# Altium PCB PCB2.PcbDoc
Units mil, origin at the board's own origin, x right, y up, seen from the top; angles counter-clockwise.
Board outline 2070.38 x 1535.06 mil, 2 copper layers (Top Layer, Bottom Layer); 44 components, 42 nets, 192 pads, 68 vias.
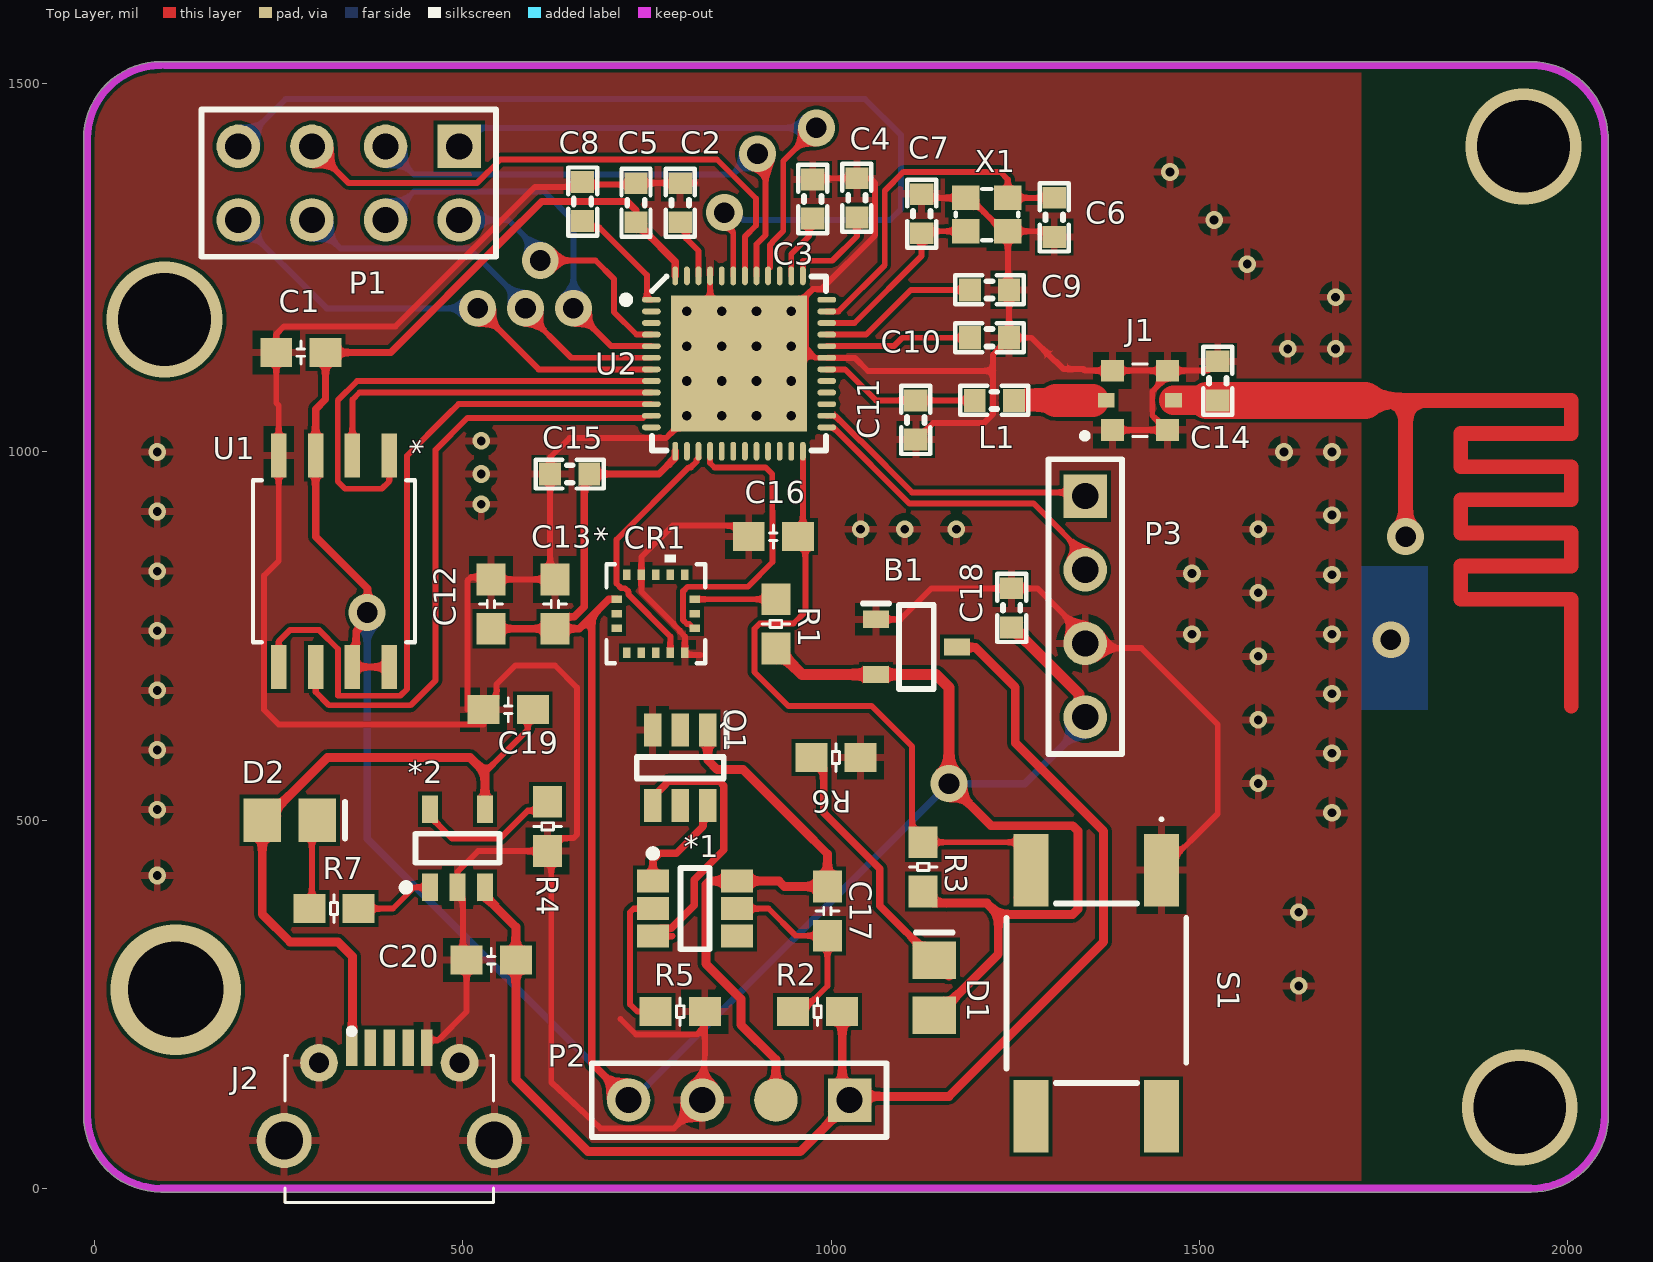
[diagram p0: Top Layer view]
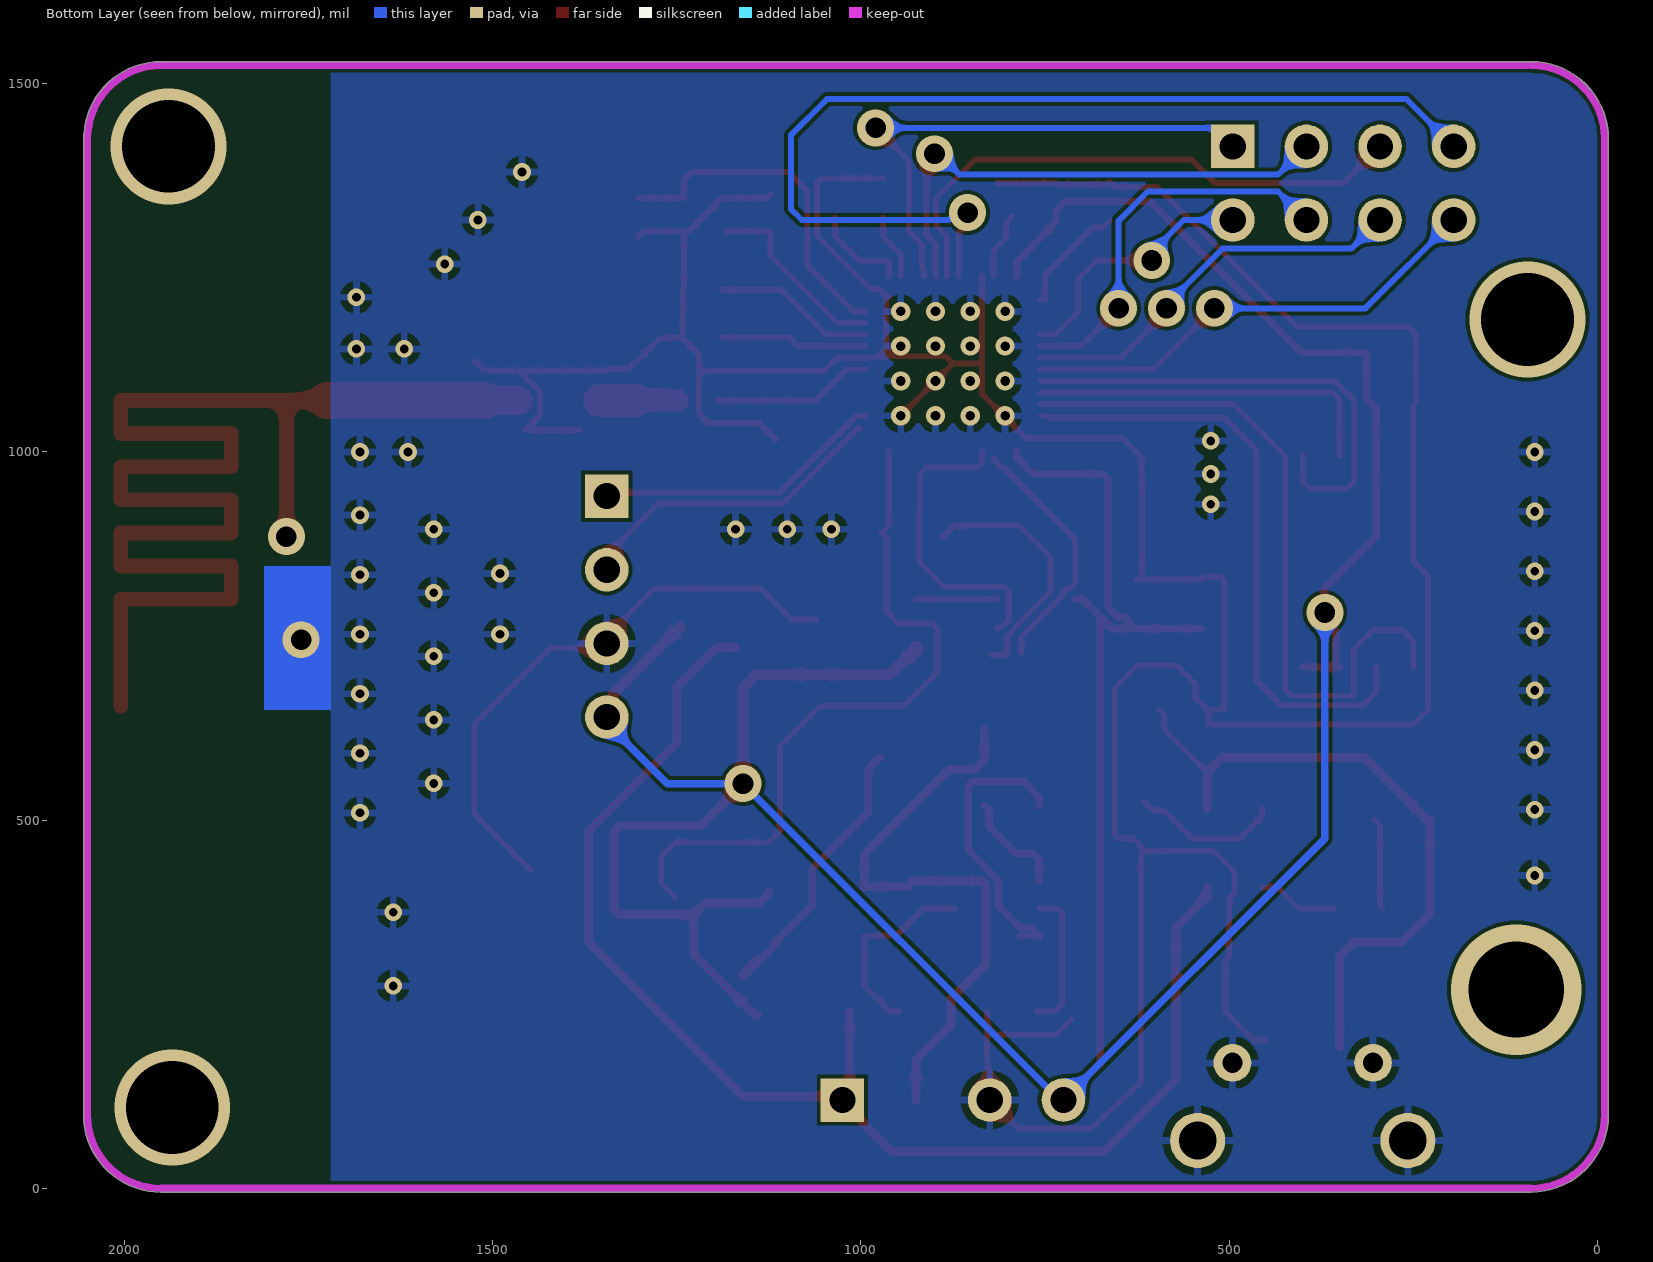
[diagram p1: Bottom Layer view, seen from below]
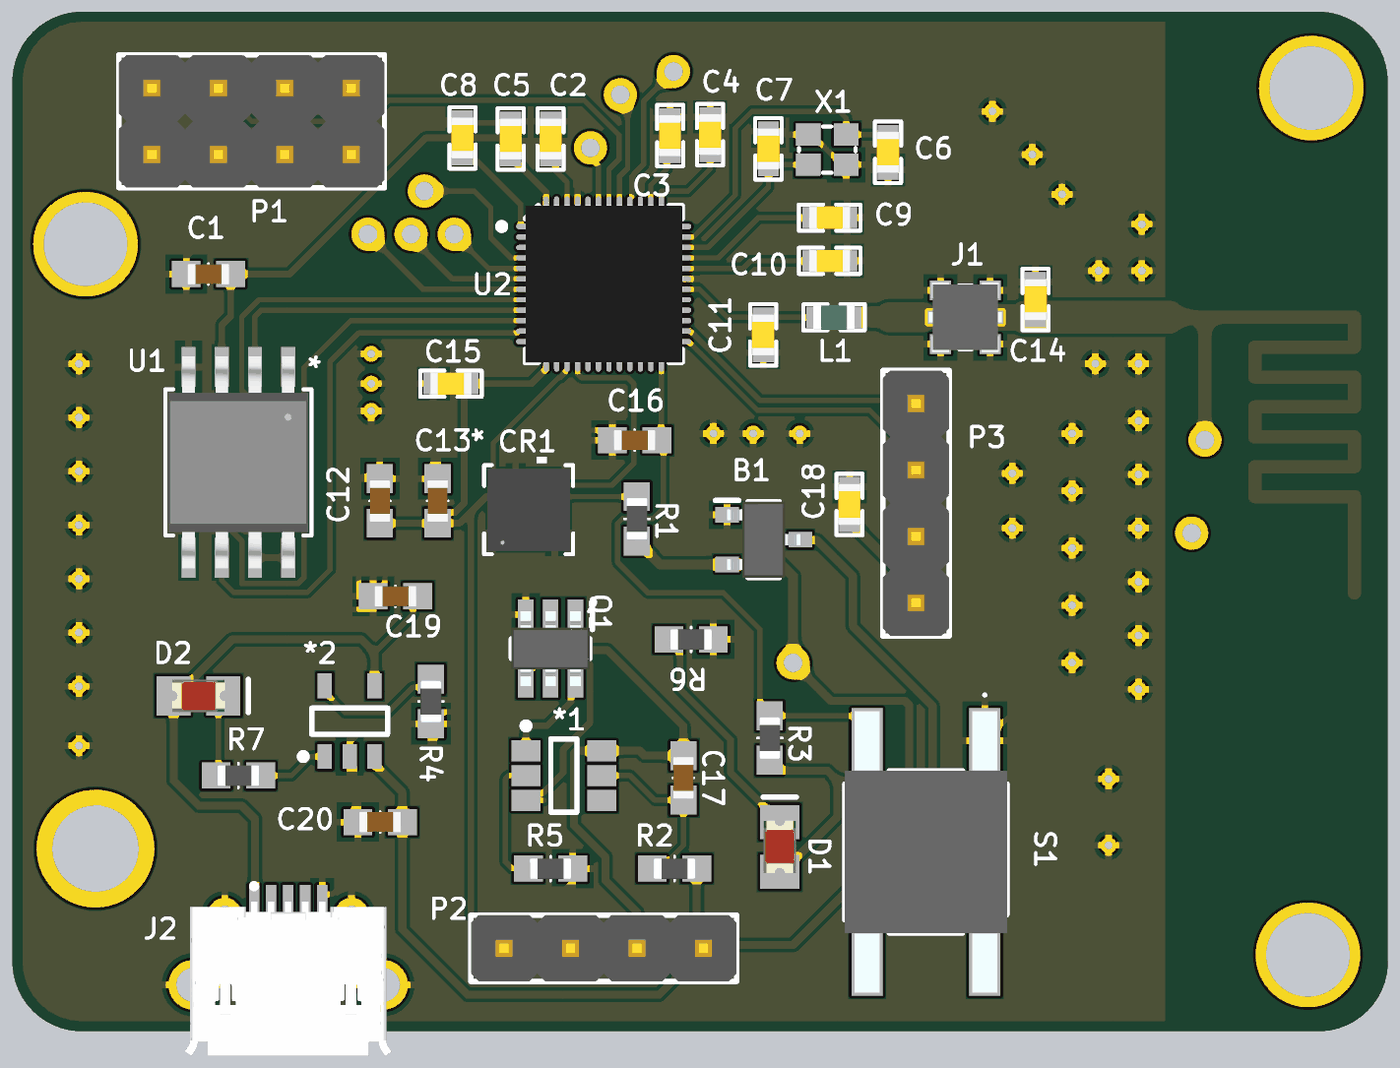
[diagram p2: 3D render of the assembled board from above, using the file's embedded part models]

## Layer stack, top to bottom
Top Solder: solder mask 0.4, Solder Resist, Dk 3.5
Top Layer: signal copper 1.4
Dielectric 1: dielectric 12.6, FR-4, Dk 4.8
Bottom Layer: signal copper 1.4
Bottom Solder: solder mask 0.4, Solder Resist, Dk 3.5

## Board outline
-15.02,100 ccw(c90,100) 89.97,-5.02 ccw(c90,0) 90,-5.02 1949.82,-5.02 ccw(c1950.35,-0.03) 1950.35,-5.04 ccw(c1950.35,99.97) 2055.37,99.97 ccw(c2050.35,99.97) 2055.01,101.82 2055.01,1430 ccw(c2050,1430) 2054.82,1431.38 ccw(c1950,1425) 1950,1530.01 1575,1530.01 ccw(c1575,1525) 1574.94,1530.01 95,1530.01 ccw(c95,1525) 92.5,1529.35 ccw(c90,1525) 90,1530.01 ccw(c90,1425) -15.02,1425.05 ccw(c-10,1425) -15.02,1425

## Design rules (kind name [scope] priority, off if disabled: settings)
Clearance [All] p1: gap=5 ignorepadtopadclearanceinfootprint=FALSE
HoleSize [All] p1: absolutevalues=TRUE maxlimit=129.92 minlimit=1 maxpercent=80.000 minpercent=20.000
MinimumSolderMaskSliver [All] p1: minsoldermaskwidth=0
PolygonConnect [All] p1: connectstyle=Relief reliefconductorwidth=10 reliefentries=4 polygonreliefangle="90 Angle" airgapwidth=10
RoutingVias [All] p1: holewidth=28 width=50 viastyle="Through Hole" minholewidth=28 minwidth=50 maxholewidth=28 maxwidth=50
ShortCircuit [All] p1 off: allowed=FALSE
SilkToSilkClearance [All] p1: silktosilkclearance=0
SilkToSolderMaskClearance [IsPad] p1: minsilkscreentomaskgap=0 clearancetoexposedcopper=TRUE
SolderMaskExpansion [All] p1: expansion=4 istentingtop=FALSE
Width [All] p1: maxlimit=50 minlimit=5 preferedwidth=8 minimp=50.000000 maximp=50.000000 favimp=50.000000
25 further rules are at their usual default settings.

## Components (designator, comment, footprint, x,y, rotation, side; value= is the part's Value field where it differs from the comment)
*1 "DW01A" DW01 815,380 r0 top
*2 "TP4054" TP4054 492.6,461.85 r90 top
B1 "XC6206P332MR-G" SOT95P280X130-3N 1115.79,735.2 r0 top
C1 "0.1uF" Cap-0603 280,1135 r180 top
C2 "1.0uF" CAPC1608X06L 795,1338.43 r90 top
C3 "12pF" CAPC1608X06L 975,1343.42 r90 top
C4 "12pF" CAPC1608X06L 1035,1345 r90 top
C5 "4.7uF" CAPC1608X06L 735,1338.42 r270 top
C6 "16pF" CAPC1608X06L 1302.91,1318.43 r270 top
C7 "16pF" CAPC1608X06L 1122.91,1323.42 r90 top
C8 "100nF" CAPC1608X06L 662.46,1340 r270 top
C9 "100pF" CAPC1608X06L 1215,1220 r0 top
C10 "100pF" CAPC1608X06L 1215,1155 r0 top
C11 "0.8pF" CAPC1608X06L 1115,1043.43 r90 top
C12 "100nF" Cap-0603 538.07,793.46 r270 top
C13 "10uF" Cap-0603 625,793.46 r270 top
C14 "1.2pF" CAPC1608X06L 1525,1096.57 r270 top
C15 "100nF" CAPC1608X06L 645,970 r0 top
C16 "10uF" Cap-0603 921.54,885 r0 top
C17 "0.1uF" Cap-0603 995,376.54 r270 top
C18 "1uF" CAPC1608X06L 1245,788.19 r270 top
C19 "10uF" Cap-0603 561.54,650 r180 top
C20 "10uF" Cap-0603 538.47,310 r180 top
CR1 "LIS3DH" LGA-16_3x3x1mm_STM 762,780.31 r90 top
D1 "LED" LED-0805 1140,272.6 r90 top
D2 "LED" LED-0805 265,500 r0 top
J1 "MM8130-2600RA2" MM81302600RA2 1419.33,1070 r90 top
J2 "MICROXNJ" MICROXNJ 400,65 r180 top
L1 "3.9nH" INDC1608X06L 1221.58,1070 r0 top
P1 "Header 4X2" HDR2X4 495,1415 r180 top
P2 "Header 4" HDR1X4#1 875,120 r180 top
P3 "Header 4" HDR1X4#2 1345,790 r270 top
Q1 "UMW8205A" SOT95P285X140-6N 795,571.18 r270 top
R1 "10k" Res-0603 925,766.54 r270 top
R2 "100Ω" Res-0603 981.54,240 r0 top
R3 "10kΩ" Res-0603 1125,436.54 r90 top
R4 "1kΩ" Res-0603 615,491.54 r270 top
R5 "1kΩ" Res-0603 795,240 r180 top
R6 "1kΩ" Res-0603 1006.54,585 r180 top
R7 "1kΩ" Res-0603 325,380 r180 top
S1 "K2-1839SP-C4SW-02" K21839SPC4SW02 1360,265 r270 top
U1 "W25Q128JVSIQ" SOIC_128JVSIQ_WIN 325,851.5 r270 top
U2 "nRF52832-QFAA" QFN40P600X600X90-48N 875,1120 r0 top
X1 "32MHz" BT-XTAL_2016 1211.46,1322.36 r0 top

## Footprints (in the part's own frame and the unit in brackets; to place one, negate y for a bottom-side part, rotate by r counter-clockwise, add the part's x,y. Pads: shape width x height; smd on the part's side, far side on the other; paste and mask are expansions set on the pad)
BT-XTAL_2016 [mm]
  rect 0.95x0.85 smd: 1(-0.725,-0.575) 2(0.725,-0.575) 3(0.725,0.575) 4(-0.725,0.575)
  silkscreen extent -1.08,-0.88 1.08,0.88
Cap-0603 [mm]
  rect 1.1x1 smd: 1(-0.85,0) 2(0.85,0)
  silkscreen extent -0.13,-0.4 0.13,0.4, body extent -0.8,-0.4 0.8,0.4, height 0.6
CAPC1608X06L [mm]
  rect 0.75x0.8 smd: 1(-0.675,0) 2(0.675,0)
  silkscreen extent -1.18,-0.5 1.18,0.5, body extent -0.8,-0.43 0.8,0.43, height 0.8
DW01 [mm] "SOT23, 6-Leads, Body 2.95x2.75mm, Pitch 0.95mm, IPC Medium Density"
  rect 1.1x0.8 smd: 1(-1.45,0.95) 2(-1.45,0) 3(-1.45,-0.95) 4(1.45,-0.95) 5(1.45,0) 6(1.45,0.95)
  silkscreen extent -1.57,-1.4 0.5,2.02, body extent -0.9,-1.4 0.9,1.4, height 1.3
HDR1X4#1 [mm] "Connector; Header; 4 Position"
  rect 1.5x1.5 hole 0.9: 1(-3.81,0)
  round 1.5 smd: 2(-1.27,0)
  round 1.5 hole 0.9: 3(1.27,0) 4(3.81,0)
  silkscreen extent -5.08,-1.27 5.08,1.27, body extent -5.08,-1.27 5.08,1.27, height 10.1
HDR1X4#2 [mm] "Connector; Header; 4 Position"
  rect 1.5x1.5 hole 0.9: 1(-3.81,0)
  round 1.5 hole 0.9: 2(-1.27,0) 3(1.27,0) 4(3.81,0)
  silkscreen extent -5.08,-1.27 5.08,1.27, body extent -5.08,-1.27 5.08,1.27, height 10.1
HDR2X4 [mm] "Connector; Header; 4x2 Position"
  rect 1.5x1.5 hole 0.9: 1(0,0)
  round 1.5 hole 0.9: 2(0,2.54) 3(2.54,0) 4(2.54,2.54) 5(5.08,0) 6(5.08,2.54) 7(7.62,0) 8(7.62,2.54)
  silkscreen extent -1.27,-1.27 8.89,3.81, body extent -1.27,-1.27 8.89,3.81, height 10.1
INDC1608X06L [mm]
  rect 0.75x0.8 smd: 1(-0.675,0) 2(0.675,0)
  silkscreen extent -1.18,-0.5 1.18,0.5, body extent -0.8,-0.48 0.8,0.48, height 0.8
K21839SPC4SW02 [mm]
  rect 2.5x1.2 smd: 1(-4.25,2.25) 2(4.25,2.25) 3(-4.25,-2.25) 4(4.25,-2.25)
  silkscreen extent -6.05,-3.1 3.1,3.1, body extent -5.38,-3.1 5.38,3.1, height 7.6
LED-0805 [mm] "贴片LED"
  rect 1.3x1.5 smd: 1(-0.95,0) 2(0.95,0)
  silkscreen extent 1.91,-0.63 1.91,0.64, body extent -1.01,-0.62 1.01,0.63, height 1.1
LGA-16_3x3x1mm_STM [mil]
  rect 14x10 smd paste-1.4 mask+2: 1(-53,39.37) 2(-53,19.68) 3(-53,0) 4(-53,-19.69) 5(-53,-39.37) 9(53,-39.37) 10(53,-19.69) 11(53,0) 12(53,19.68) 13(53,39.37)
  rect 10x14 smd paste-1.4 mask+2: 6(-19.68,-53) 7(0,-53) 8(19.69,-53) 14(19.69,53) 15(0,53) 16(-19.68,53)
  silkscreen extent -67,-67 80,67, body extent -62,-62 62,62, height 39
MICROXNJ [mm]
  rect 0.4x1.25 smd: 1(1.3,-3.2) 2(0.65,-3.2) 3(0,-3.2) 4(-0.65,-3.2) 5(-1.3,-3.2)
  round 1.3 hole 0.7: MH1(2.425,-2.68) MH2(-2.425,-2.68)
  round 1.9 hole 1.3: MH3(3.625,0) MH4(-3.625,0)
  silkscreen extent -3.6,-3.87 3.6,2.13, body extent -3.95,-3.18 3.95,2.72, height 2.55
MM81302600RA2 [mm]
  rect 0.75x0.8 smd: 1(-1.025,0.95) 3(1.025,0.95) 4(1.025,-0.95) 6(-1.025,-0.95)
  rect 0.5x0.58 smd: 2(0,1.16) 5(0,-1.16)
  silkscreen extent -1.32,-0.25 1.25,2, body extent -1.33,-1.4 1.33,1.4, height 1.6
QFN40P600X600X90-48N [mm]
  oval 0.65x0.2 smd: 1(-3.025,2.2) 2(-3.025,1.8) 3(-3.025,1.4) 4(-3.025,1) 5(-3.025,0.6) 6(-3.025,0.2) 7(-3.025,-0.2) 8(-3.025,-0.6) 9(-3.025,-1) 10(-3.025,-1.4) 11(-3.025,-1.8) 12(-3.025,-2.2) 25(3.025,-2.2) 26(3.025,-1.8) 27(3.025,-1.4) 28(3.025,-1) 29(3.025,-0.6) 30(3.025,-0.2) 31(3.025,0.2) 32(3.025,0.6) 33(3.025,1) 34(3.025,1.4) 35(3.025,1.8) 36(3.025,2.2)
  oval 0.2x0.65 smd: 13(-2.2,-3.025) 14(-1.8,-3.025) 15(-1.4,-3.025) 16(-1,-3.025) 17(-0.6,-3.025) 18(-0.2,-3.025) 19(0.2,-3.025) 20(0.6,-3.025) 21(1,-3.025) 22(1.4,-3.025) 23(1.8,-3.025) 24(2.2,-3.025) 37(2.2,3.025) 38(1.8,3.025) 39(1.4,3.025) 40(1,3.025) 41(0.6,3.025) 42(0.2,3.025) 43(-0.2,3.025) 44(-0.6,3.025) 45(-1,3.025) 46(-1.4,3.025) 47(-1.8,3.025) 48(-2.2,3.025)
  rect 4.7x4.7 smd: 49(0,0)
  silkscreen extent -4.02,-3 3,3, body extent -3.02,-3.02 3.02,3.02, height 0.86
Res-0603 [mm]
  rect 1.1x1 smd: 1(-0.85,0) 2(0.85,0)
  silkscreen extent -0.13,-0.48 0.13,0.48, body extent -0.8,-0.4 0.8,0.4, height 0.38
SOIC_128JVSIQ_WIN [mil]
  rect 60x21 smd paste+0 mask+0: 1(-143.5,75) 2(-143.5,25) 3(-143.5,-25) 4(-143.5,-75) 5(143.5,-75) 6(143.5,-25) 7(143.5,25) 8(143.5,75)
  silkscreen extent -110,-110 110,110, body extent -159,-105 159,105, height 85
SOT95P280X130-3N [mm]
  rect 0.9x0.6 smd: 1(-1.4,0.95) 2(-1.4,-0.95) 3(1.4,0)
  silkscreen extent -1.85,-1.45 0.6,1.5, body extent -10,-3.38 10,3.38, height 5.8
SOT95P285X140-6N [mm]
  rect 1.15x0.6 smd: 1(-1.3,0.95) 2(-1.3,0) 3(-1.3,-0.95) 4(1.3,-0.95) 5(1.3,0) 6(1.3,0.95)
  silkscreen extent -1.88,-1.5 0.38,1.6, body extent -1.43,-1.5 1.43,1.5, height 1.4
TP4054 [mm] "SOT23, 5-Leads, Body 2.90x2.80mm, Pitch 0.95mm, IPC Medium Density"
  rect 0.95x0.55 smd: 1(-1.35,0.95) 2(-1.35,0) 3(-1.35,-0.95) 4(1.35,-0.95) 5(1.35,0.95)
  silkscreen extent -1.47,-1.45 0.5,1.9, body extent -0.87,-1.45 0.87,1.45, height 1

## Part data
*1: library part DW01, "锂电池放电能量管理芯片"
*2: "充电管理芯片"
B1: "LDO Voltage Regulators", Manufacturer_Name=Torex, Mouser Part Number=865-XC6206P332MR-G, Datasheet Link=https://www.torexsemi.com/file/xc6206/XC6206.pdf, Geometry.Height=1.3mm, Manufacturer_Part_Number=XC6206P332MR-G, Mouser Price/Stock=https://www.mouser.co.uk/ProductDetail/Torex-Semiconductor/XC6206P332MR-G?qs=AsjdqWjXhJ%2FXxNpRY3zZ8g%3D%3D
C1 C12 C13 C16 C17 C19 C20: library part Cap
C2 C3 C4 C5 C6 C7 C8 C9 C10 C11 C14 C15 C18: "Capacitor, X5R, ±10%", Part Number=C0603-4µ7, Artikkelnr Noca=20069060, Artikkelnr Simpro=N.A., Footprint Doc=0603, LatestRevisionDate=2009-11-23, Note=6.3V, Pin Count=2, Published=2009-05-08, Publisher="Nordic Semiconductor"
CR1: "加速度传感器模块", Mfr_Name=STMicroelectronics, Copyright="Copyright (C) 2023 Ultra Librarian. All rights reserved.", Manufacturer_Part_Number=LIS3DH, RefDes=RefDes, Type=DEV
D1 D2: "充电指示灯"
J1: "Connector", Manufacturer_Name="Murata Electronics", Mouser Part Number=81-MM8130-2600RA2, Arrow Part Number=MM8130-2600RA2, Arrow Price/Stock=https://www.arrow.com/en/products/mm8130-2600ra2/murata-manufacturing?region=nac, Datasheet Link=https://datasheet.datasheetarchive.com/originals/distributors/Datasheets_SAMA/589e44b7d5a6bf6f2f6a9b110e94adf4.pdf, Height=1.5mm, Manufacturer_Part_Number=MM8130-2600RA2, Mouser Price/Stock=https://www.mouser.co.uk/ProductDetail/Murata-Electronics/MM8130-2600RA2?qs=pwh76yelNxAj%2FSz0%2FLo03A%3D%3D
J2: "Connector", Manufacturer_Name="Shou Han", Datasheet Link=https://datasheet.lcsc.com/szlcsc/1912111437_SHOU-HAN-MicroXNJ_C404969.pdf, Height=2.425mm, Manufacturer_Part_Number=MICROXNJ
L1: "Chip inductor, IDC,min = 50 mA, ±20%", 2nd source part number=178-6105, Manufacturer="Taiyo Yuden", Manufacturer Part Number=LBMF1608T100K, Part Number=L0603-10µ, Supplier part number=587-1714-1-ND, 2nd source Supplier=Farnell, Artikkelnr Noca=33029314, Artikkelnr Simpro=N.A., Datasheet=http://www.yuden.co.jp/ut/product/pdf/elb2_e.pdf, Footprint Doc=0603, LatestRevisionDate=2012-09-19, Note="LBMF1608T100K 10µH 80mA 0603", Pin Count=2, Published=2010-02-24, Publisher="Nordic Semiconductor", Supplier=Digi-Key
P1: "Header, 4-Pin, Dual row", LatestRevisionDate=17-Jul-2002, LatestRevisionNote="Re-released for DXP Platform.", Publisher="Altium Limited"
P2 P3: "Header, 4-Pin", LatestRevisionDate=17-Jul-2002, LatestRevisionNote="Re-released for DXP Platform.", Publisher="Altium Limited"
Q1: "MOSFET (N-Channel)", Manufacturer_Name=UMW, Datasheet Link=https://datasheet.lcsc.com/szlcsc/1904151404_Youtai-Semiconductor-Co-Ltd-UMW8205A_C351449.pdf, Height=1.4mm, Manufacturer_Part_Number=UMW8205A
R1 R2 R3 R4 R5 R6 R7: library part Res
S1: "Switch", Manufacturer_Name="Korean Hroparts Elec", Datasheet Link=https://datasheet.lcsc.com/szlcsc/2003231806_Korean-Hroparts-Elec-K2-1839SP-C4SW-02_C164133.pdf, Height=7.5mm, Manufacturer_Part_Number=K2-1839SP-C4SW-02
U1: "128M闪存", Mfr_Name=Winbond, Copyright="Copyright (C) 2023 Ultra Librarian. All rights reserved.", Manufacturer_Part_Number=W25Q128JVSIQ, RefDes=RefDes, Type=DEV
U2: "Multi-protocol Bluetooth Low Energy, ANT and 2.4GHz proprietary system-on-chip", Manufacturer="Nordic Semiconductor", Artikkelnr Noca=N.A., Artikkelnr Simpro=N.A., Footprint Doc=QFN-48, LatestRevisionDate=2014-11-26, Manufacturer Part Number=nRF52832-QFAA, Part Number=nRF52832-QFAA, Pin Count=48, Published=2014-11-26, Publisher="Nordic Semiconductor", Supplier="Nordic Semiconductor"
X1: "XTAL SMD 2016, 32MHz, Cl=12pF, Total Tol: ±10ppm", Manufacturer="Epson Toyocom", Manufacturer Part Number=Q22FA12800025, Part Number=XTAL_SMD2016_32MHz_8pF_Epson, Supplier part number=171-2806, Artikkelnr Noca=N.A., Artikkelnr Simpro=N.A., Datasheet=http://www.epsondevice.com/docs/qd/en/DownloadServlet?id=ID000449, Footprint Doc=XTAL_2016, LatestRevisionDate=2014-11-27, Note="XTAL SMD 32.000MHz", Pin Count=4, Published=2012-03-09, Publisher="Nordic Semiconductor", Supplier=Farnell

## Via types
v1: diameter 24, hole 12, Top Layer to Bottom Layer, 37 vias
v2: diameter 25.98, hole 12.99, Top Layer to Bottom Layer, 16 vias
v3: diameter 50, hole 28, Top Layer to Bottom Layer, 11 vias
v4: diameter 157.48, hole 125.98, Top Layer to Bottom Layer, 3 vias
v5: diameter 177.17, hole 129.92, Top Layer to Bottom Layer, 1 vias

## Nets (pads, with @x,y where several pads share a name; then routed paths per layer and width w, separated by ;. In a path a pad name is that pad's centre, name@x,y a point inside that pad or via, vN(x,y) a via of type N, cw(c..) or ccw(c..) an arc to the next point about the centre after c; other vN are vias at no path point)
ADC0: P1.2 U2.4 | length 358.4
  Top Layer w8: v3(605,1260) 680,1260 705,1235 705,1190 735.63,1159.37 U2.4
  Bottom Layer w8: P1.2 561.37,1315 605,1271.37 v3(605,1260)
ADC1: P1.4 U2.5 | length 533.5
  Top Layer w8: v3(650,1195) 701.38,1143.62 U2.5
  Bottom Layer w8: P1.4 433.53,1353.53 610.47,1353.53 650,1314 v3(650,1195)
ADC2: P1.6 U2.6 | length 544.3
  Top Layer w8: v3(585,1195) 585,1190 647.13,1127.87 U2.6
  Bottom Layer w8: P1.6 334,1276 509,1276 585,1200 v3(585,1195)
ADC3: P1.8 U2.7 | length 644.9
  Top Layer w8: v3(520,1195) 602.87,1112.13 U2.7
  Bottom Layer w8: P1.8 315,1195 v3(520,1195)
ADC4: P1.1 U2.40 | length 723.4
  Top Layer w8: U2.40 914.37,1247.83 917.18,1250.64 917.18,1281.21 920,1284.03 920,1285 935,1300 935,1395 v3(980,1440)
  Bottom Layer w8: P1.1 520,1440 v3(980,1440)
ADC5: P1.3 U2.41 | length 708.3
  Top Layer w8: U2.41 898.62,1282.01 910.98,1294.36 910.98,1382.66 900,1393.63 v3(900,1405)
  Bottom Layer w8: P1.3 433.53,1376.47 865.79,1376.47 894.31,1405 v3(900,1405)
ADC6: P1.5 U2.42 | length 770.1
  Top Layer w8: P1.5 345,1365 519,1365 551,1397 845,1397 897.98,1344.02 897.98,1307.45 882.87,1292.35 U2.42
ADC7: P1.7 U2.43 | length 1388.1
  Top Layer w8: v3(855,1325) 863.04,1316.96 863.04,1301.96 867.13,1297.87 U2.43
  Bottom Layer w8: P1.7 259,1479 1046,1479 1095,1430 1095,1330 1080,1315 880.69,1315 878.72,1316.96 863.04,1316.96 v3(855,1325)
BAT+: *2.3 B1.3 C20.1 P2.1 R2.2 | length 1863.5
  Top Layer w12: *2.3 530,396.93 571.93,355 C20.1 571.93,148.07 670,50 958,50 1015,107 P2.1@1015,130 ; R2.2 P2.1@1015,130 ; B1.3 1171.52,734.58 1195.93,734.58 1250,680.51 1250,605 1370,485 1370,335 1160,125 1030,125 P2.1 P2.1@1015,130
BAT-: *1.6 C17.1 P2.2 Q1.1 | length 802.3
  Top Layer w12: Q1.1 832.4,581.72 845.49,568.64 880.52,568.64 959.15,490 995,454.15 C17.1 936.4,410 929,417.4 *1.6 834.69,417.4 830,412.72 830,305 877.5,257.5 877.5,222.5 925,175 P2.2
FLASH_CS: U1.1 U2.8 | length 660.1
  Top Layer w8: U1.1 400,960 390,950 340,950 330,960 330,1070 356.38,1096.38 U2.8
FLASH_MISO: U1.2 U2.9 | length 485.9
  Top Layer w8: U1.2 350,1071 359.63,1080.63 U2.9
FLASH_MOSI: U1.5 U2.10 | length 970.8
  Top Layer w8: U1.5 250,743 265,758 305,758 330.5,732.5 330.5,669 415,669 424,678 424,994.88 478.08,1048.96 494,1064.88 U2.10
FLASH_SCK: U1.6 U2.11 | length 843.6
  Top Layer w8: U1.6 300,674 318,656 429,656 463,690 463,1003 506.32,1046.32 744.36,1046.32 747.17,1049.13 U2.11
GND: *2.2 B1.1 C1.2 C2.2 C3.2 C4.2 C5.1 C6.2 C7.2 C8.1 C9.2 C10.2 C11.1 C12.1 C13.1 C14.1 C15.1 C16.1 C18.1 C19.2 C20.2 CR1.5 CR1.12 J1.1 J1.3 J1.4 J1.6 J2.5 J2.MH1 J2.MH2 J2.MH3 J2.MH4 P2.3 P3.3 Q1.3 R4.2 R5.1 R6.1 S1.1 U1.4 U2.31 U2.45 U2.49 X1.2 X1.4 | length 7143.6
  Top Layer w8: J2.5@451.18,200 452.55,201.37 466.37,201.37 505,240 C20.2 500,315 500,393.42 492.6,400.83 492.6,430 520.67,458.07 R4.2 ; 714,230 735,209 817.46,209 828.46,220 ; 815,1365 C2.2 C5.1 732.91,1362.91 666.13,1362.91 C8.1 655.88,1360 598,1360 542,1304 408.54,1170.54 257.07,1170.54 246.54,1160 C1.2 246.54,1066.46 250,1063 U1.4 250,852 230,832 230,650 250,630 528.07,630 C19.2 ; 822.49,724.31 802.37,724.31 801.37,725.31 801.37,749.53 794.69,756.22 794.69,757.52 786,766.2 786,766.94 742.32,810.62 CR1.12 742.32,857.32 785,900 873.07,900 C16.1 ; R5.1 828.46,220 ; U2.45 U2.49@835.63,1120 ; v2(945.87,1049.13) v2(898.62,1096.38) U2.49 ; v2(945.87,1143.62) 951.22,1138.26 U2.49@966,1138.26 ; C3.2@970,1371.58 C4.2 1053.17,1371.58 1059.75,1365 1059.75,1294 986.75,1221 975,1221 966,1212 966,1140 976,1130 ; B1.1 1094,772.6 1136.17,814.77 C18.1 1280.23,814.77 P3.3@1355,740 ; C11.1 1115.98,1016.85 1138.2,1039.07 1207.31,1039.07 1220,1051.76 1220,1110 ; C7.2 1127.91,1345 X1.4 1188,1345 1233.28,1299.72 X1.2 ; C6.2 1295.07,1299.7 1279.85,1299.7 X1.2 ; P3.3 P3.3@1355,740 ; J1.1 J1.6@1455.75,1029.65 ; S1.1 1525,508.74 1525,630 1421.36,733.64 1361.36,733.64 P3.3@1355,740 ; J1.6 J1.6@1455.75,1029.65 ; C14.1 1524.02,1123.15 1511.22,1110.35 J1.4@1464.34,1110.35 ; C19.2 530.04,650 545.72,665.69 545.72,684.46 571.26,710 625,710 655,680 655,480.41 650.31,475.72 630.69,475.72 615,460.04 R4.2 ; C19.2 506,650 506,825 511,830 535,830 C12.1 C13.1 618.43,833.5 C15.1 619.06,970.64 619.06,993.06 645,1019 776,1019 835.63,1078.63 U2.49@835.63,1120 ; R4.2 620,453.07 620,144.06 686.69,81.47 786.47,81.47 P2.3 828.46,181.46 828.46,220 ; U2.49@835.63,1120 U2.49 ; U2.49 885,1130 976,1130 ; 976,1130 978.13,1127.87 U2.31 994.16,1127.81 1003.02,1127.81 1003.08,1127.75 1032.25,1127.75 1050,1110 1220,1110 ; 1220,1110 1220,1132.44 1241.57,1154.02 C10.2 ; X1.2 1240,1221.57 C9.2 C10.2 ; C10.2 1272.17,1155 1304.02,1123.15 1305,1123.15 1315.76,1112.39 1342.45,1112.39 1344.48,1110.35 J1.3 J1.4 J1.4@1464.34,1110.35 ; J1.6@1455.75,1029.65 1436,1049.39 1436,1082.01 J1.4@1464.34,1110.35
  other v1: 1635,275 1635,375 85,425 1680,510 85,514.36 1580,550 1680,590.83 85,595.3 1580,636.25 1680,671.67 85,676.24 1580,722.5 1490,752.5 1680,752.5 85,757.18 1580,808.75 1680,833.33 1490,835 85,838.12 1040,895 1100,895 1170,895 1580,895 1680,914.17 85,919.06 525,929.05 525,970 85,1000 1615,1000 1680,1000 525,1015 1620,1140 1685,1140 1685,1210 1565,1255 1520,1315 1460,1380
  other v2: 804.13,1049.13 851.38,1049.13 898.62,1049.13 804.13,1096.38 851.38,1096.38 945.87,1096.38 804.13,1143.62 851.38,1143.62 898.62,1143.62 804.13,1190.87 851.38,1190.87 898.62,1190.87 945.87,1190.87
  other v3: 1760,745
Net*1_1: *1.1 Q1.6 | length 146.7
  Top Layer w10: *1.1 757.91,445.51 767.4,455 790,455 825.87,490.87 825.87,513.47 Q1.6
Net*1_2: *1.2 R5.2 | length 196.7
  Top Layer w8: *1.2 732,380 727,375 727,250 737,240 R5.2
Net*1_3: *1.3 Q1.4 | length 398.6
  Top Layer w8: *1.3 785,342.6
  Top Layer w10: Q1.4 757.6,530.83 771.98,545.2 771.98,545.57 779.05,552.64 848.35,552.64 854.21,546.78 854.21,459.56 814,419.34 814,384.54 782.8,353.35 768.66,353.35 *1.3
Net*1_5: *1.5 C17.2 R2.1 | length 267.8
  Top Layer w8: *1.5 915,380 951.93,343.07 C17.2 995,274.91 960.09,240 R2.1
Net*2_1: *2.1 R7.1 | length 108.6
  Top Layer w8: R7.1 405,380 433.7,408.7 *2.1
Net*2_4: *2.4 C19.1 D2.1 J2.1 | length 906.1
  Top Layer w8: D2.1 D2.1@231,500 ; J2.1 J2.1@350,192.17 ; 530,565 588,623 588,643 C19.1
  Top Layer w11.99: D2.1 227.6,372.4 265.27,334.73 330.27,334.73 350,315 J2.1@350,192.17 ; D2.1@231,500 316,585 510,585 530,565 *2.4
Net*2_5: *2.5 R4.1 | length 202.7
  Top Layer w8: *2.5 455.2,505.41 485.61,475 550,475 588,513 603,513 R4.1
NetC2_1: C2.1 U2.46 | length 90.2
  Top Layer w8: C2.1@795,1318.97 803.11,1310.86 803.11,1289.77 819.88,1273 U2.46
NetC3_1: C3.1 U2.38 | length 89.3
  Top Layer w8: U2.38 945.87,1268.87 970,1293 C3.1@970,1318.43
NetC4_1: C4.1 U2.37 | length 133.2
  Top Layer w8: U2.37 961.61,1259.61 1001.61,1259.61 1035,1293 C4.1
NetC8_2: C8.2 U2.1 | length 157.3
  Top Layer w8: C8.2 671.14,1304.74 685.26,1304.74 750,1240 750,1206.61 U2.1
NetC9_1: C9.1 U2.33 | length 219.4
  Top Layer w8: U2.33 1047.55,1159.37 1108.18,1220 C9.1
NetC10_1: C10.1 U2.32 | length 199
  Top Layer w8: U2.32 1085,1143.62 1096.38,1155 C10.1
NetC11_2: C11.2 L1.1 U2.30 | length 218.4
  Top Layer w8: U2.30 1018.89,1112.13 1061.02,1070 C11.2 L1.1
NetC14_2: C14.2 J1.5 | length 2040
  Top Layer w20: 1725,1070 1780,1070 ; v3(1780,885) 1780,1070 ; 2005,655 2005,800 1855,800 1855,845 2005,845 2005,890 1855,890 1855,935 2005,935 2005,980 1855,980 1855,1025 2005,1025 2005,1070 1780,1070
  Top Layer w40: J1.5 C14.2@1510,1070
  Top Layer w50: C14.2@1510,1070 C14.2 1725,1070
NetCR1_8: CR1.8 R1.1 | length 110
  Top Layer w8: CR1.8 R1.1
NetD1_2: D1.2 R6.2 | length 375.9
  Top Layer w10: R6.2 975.04,585 989.72,570.31 989.72,510.28 1066.03,433.97 1066.03,383.97 1090,360 1115.47,334.53 1115.47,330.59 1136.06,310 D1.2
  Top Layer w15: D1.2 D1.2@1160,290
NetD2_2: D2.2 R7.2 | length 124.5
  Top Layer w8: R7.2 295,383.46 295,492.6 D2.2
nRESET: C16.2 R3.2 S1.3 U2.24 | length 972.7
  Top Layer w8: U2.24 961.61,900.31 971.93,890 965,883.07 965,783.07 948.93,767 903,767 896,760 896,700.97 941.97,655 1055,655 1110,600 1110,485 R3.2 1251.8,470 1271.42,450.38 S1.3 1271.42,414.62 S1.3@1251.8,395
RF: J1.2 L1.2 | length 106.8
  Top Layer w30: L1.2 1305,1070
  Top Layer w45: 1305,1070 1355,1070
SCL: CR1.4 U2.15 | length 345.6
  Top Layer w8: CR1.4 781.69,749.53 725,806.22 725,810 720,815 715,815 708.63,821.37 708.63,880.92 806.82,979.11 809.49,979.11 817.07,986.69 817.07,989.36 U2.15@819.82,992.11
SDA: CR1.6 U2.16 | length 424
  Top Layer w8: CR1.6 813,760.63 807.32,766.31 804.27,766.31 799,771.59 799,811 805,817 887,817 920.5,850.5 920.5,919.5 920,920 920,970 911,979 841.63,979 835.63,985 U2.16
SWDCLK: P3.2 U2.25 | length 438
  Top Layer w8: U2.25@1002.89,1033.32 1106.21,930 1275,930 1355,850 P3.2@1355,840
SWDIO: P3.1 U2.26 | length 406.1
  Top Layer w8: U2.26 1005.5,1049.13 1039.63,1015 1040,1015 1110,945 1350,945 P3.1@1355,940
VCC: B1.2 C1.1 C5.2 C12.2 C13.2 C15.2 C18.2 CR1.14 D1.1 P2.4 P3.4 R1.2 R3.1 U1.3 U1.7 U1.8 U2.13 U2.48 | length 5300.9
  Top Layer w10: U1.8 U1.7 355,713 355,756.31 363.84,765.15 363.84,788.16 v3(370,782) 370.69,782.69 370.69,814.31 300,885 U1.3 300,1058 313.46,1071.46 C1.1 402,1135 555,1288 607,1340 723,1340 735,1328 C5.2 ; C12.2 C13.2 C13.2@635,760 ; CR1.14 698,800 675,777 ; P2.4 675,170 675,777 ; C5.2@735.98,1311.85 746.75,1301.09 746.75,1300.1 788.39,1258.46 U2.48 ; U2.13 788.39,992.17 766.21,970 C15.2 665,963.43 665,790 651.15,776.15 640.69,776.15 635,770.47 C13.2@635,760 ; C13.2@635,760 658,760 675,777
  Top Layer w12: R3.1 1125,401.1 1138.69,387.42 1211.49,387.42 1226.79,372.11 ; D1.1 1143.94,235.2 1226.79,318.05 1226.79,372.11 ; v3(1160,549.68) 1217.14,492.54 1327.97,492.54 1335,485.51 1335,379.14 1327.97,372.11 1226.79,372.11
  Top Layer w15: R1.2@936.65,721.42 960.28,697.79 B1.2 1142.21,697.79 1160,680 v3(1160,549.68) ; C18.2 1245.98,761.62 1336.57,671.03 1336.57,648.43 P3.4
  Top Layer w20: R1.2 925,731.1 934.69,721.42 R1.2@936.65,721.42
  Bottom Layer w10: v3(370,782) 370,475 P2.4 730.32,120 v3(1160,549.68) 1263.05,549.68 P3.4@1353.37,640
XC1: C7.1 U2.34 X1.1 | length 258.3
  Top Layer w8: U2.34 1031.64,1175.12 1122.91,1266.4 C7.1 1125.79,1299.72 1153.87,1299.72 X1.1
XC2: C6.1 U2.35 X1.3 | length 475.5
  Top Layer w8: U2.35 1010,1190.87 1072.75,1253.61 1072.75,1354.75 1098,1380 1230,1380 1240,1370 X1.3 C6.1
pads on no net: *1.4 CR1.1 CR1.2 CR1.3 CR1.7 CR1.9 CR1.10 CR1.11 CR1.13 CR1.15 CR1.16 J2.2 J2.3 J2.4 Q1.2 Q1.5 S1.2 S1.4 U2.2 U2.3 U2.12 U2.14 U2.17 U2.18 U2.19 U2.20 U2.21 U2.22 U2.23 U2.27 U2.28 U2.29 U2.36 U2.39 U2.44 U2.47
copper on no net:
  other v4: 1935,110 95,1180 1940,1415
  other v5: 110,270

## Polygon pours and split planes (outlines as drawn)
GND on Keep-Out Layer (none, remove dead copper): -10,100 ccw(c90,100) 90,0 1475,0 ccw(c1475,100) 1575,100 1575,1425 ccw(c1475,1425) 1475,1525 95,1525 90,1525 ccw(c90,1425) -10,1425
GND on Keep-Out Layer (none, remove dead copper): -10,100 ccw(c90,100) 90,0 1475,0 ccw(c1475,100) 1575,100 1575,1425 ccw(c1475,1425) 1475,1525 95,1525 90,1525 ccw(c90,1425) -10,1425
GND on Bottom Layer "NONET_L-01_P-001" (solid, remove dead copper, pour order 4): 0,1525 1720,1525 1720,0 0,0
GND on Top Layer "NONET_L-01_P-001" (solid, remove dead copper, pour order 3): -2.61,1528.28 0.67,1525 1720,1525 1720,0 0,0 0,1525

## Keep-outs
Keep-Out Layer:
  lines w10: 90,1525 ccw(c90,1425) -10,1425 -10,100 ccw(c90,100) 90,0 1569.95,0 1950,0 ; 95,1525 1575,1525 1950,1525 cw(c1950,1425) 2050,1425 ; 1950.35,-0.03 ccw(c1950.35,99.97) 2050.35,99.97 ; 2050,100 2050,1430

## Other copper
Bottom Layer:
  region net GND: 1720,845 1810,845 1810,650 1720,650

## Text inside footprints (layer, text, board x,y; h text height)
CR1: Top Overlay "*" at 708.63,878.25 h30 r90; Mechanical 13 "*" at 722.79,721.81 h30 r90
U1: Top Overlay "*" at 416,1017.5 h30 r270; Mechanical 13 "*" at 377,954 h30 r270